# Altium PCB sot-mosfet-proto__A.PcbDoc
Units mil, origin at the board's own origin, x right, y up, seen from the top; angles counter-clockwise.
Board outline 500 x 500 mil, 2 copper layers (Top Layer, Bottom Layer), stack 61.7 mil thick; 14 components, 7 nets, 25 pads, 0 vias.
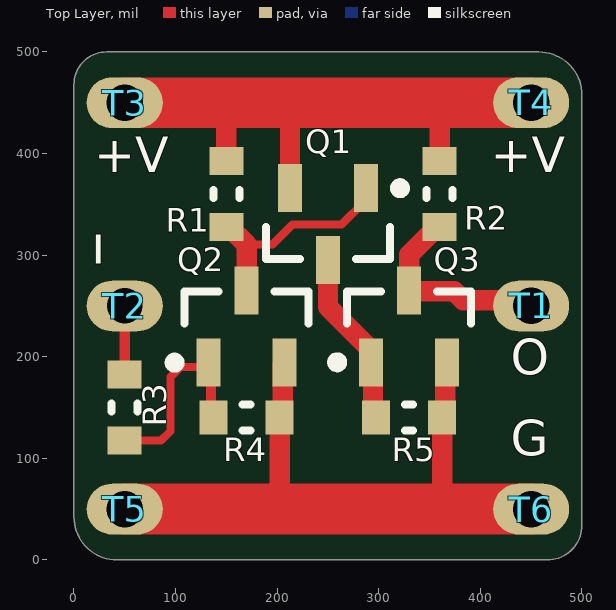
[diagram p0: Top Layer view]
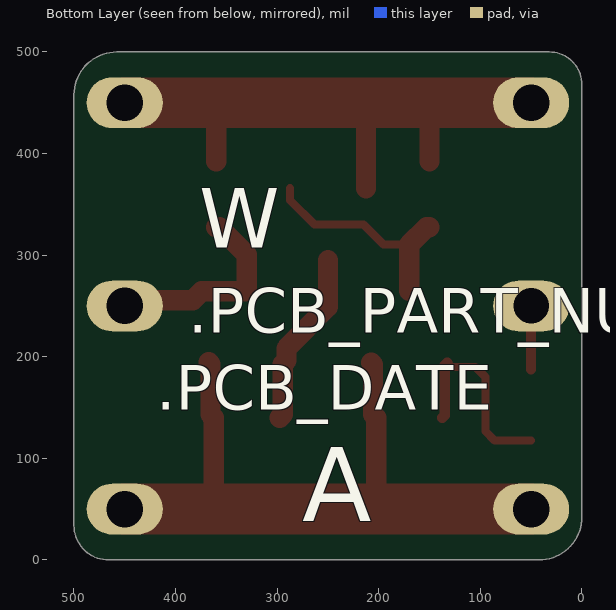
[diagram p1: Bottom Layer view, seen from below]
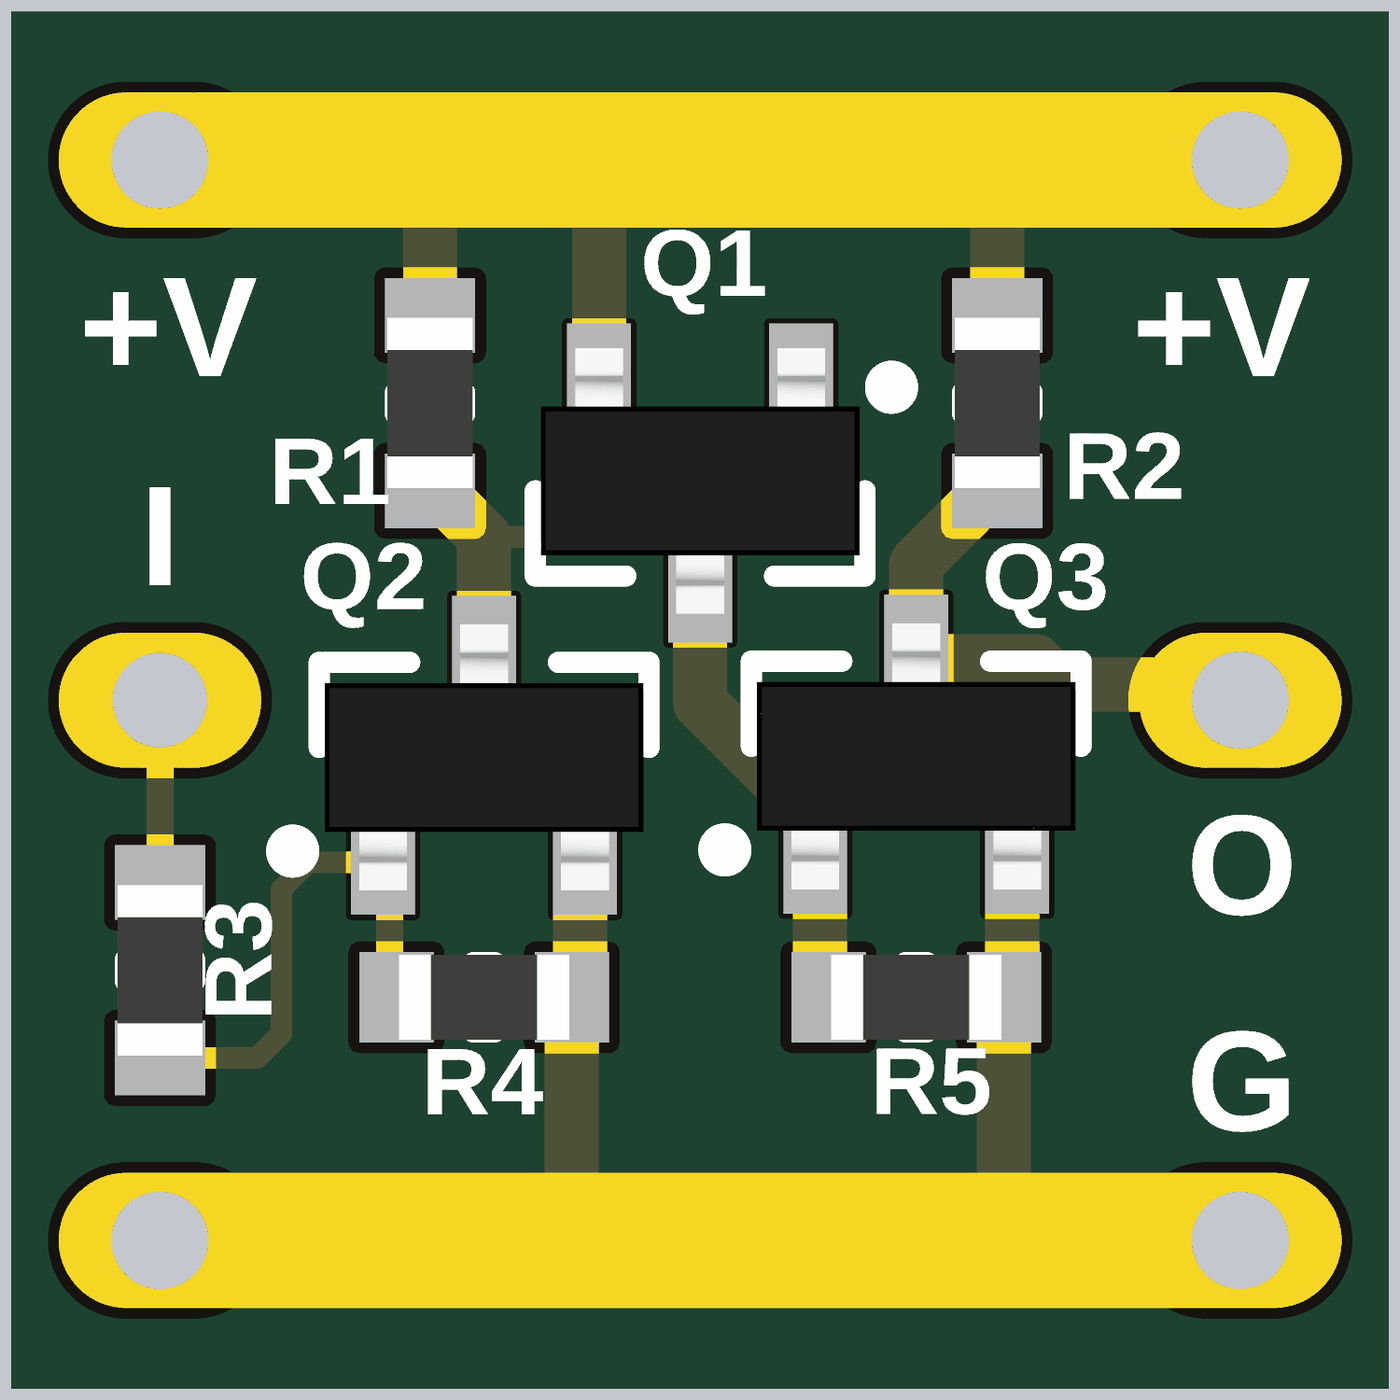
[diagram p2: 3D render of the assembled board from above, using the file's embedded part models]

## Layer stack, top to bottom
Top Solder: solder mask 0.4, Solder Resist, Dk 3.5
Top Layer: signal copper 1.4
Dielectric1: dielectric 58.9, FR-4, Dk 4.8
Bottom Layer: signal copper 1.4
Bottom Solder: solder mask 0.4, Solder Resist, Dk 3.5

## Board outline
0,42.32 0,467.75 cw(c32.25,467.75) 32.25,500 457.68,500 cw(c457.68,457.68) 500,457.68 500,34.14 cw(c465.86,34.14) 465.86,0 42.32,0 cw(c42.32,42.32)

## Design rules (kind name [scope] priority, off if disabled: settings)
Clearance [All] p1: gap=6 ignorepadtopadclearanceinfootprint=FALSE except(0: Arc-Hole Track-Hole SMDPad-Hole THPad-Hole Via-Hole Fill-Hole Poly-Hole Region-Hole Text-Hole)
PolygonConnect [All] p1: connectstyle=Relief reliefconductorwidth=10 reliefentries=4 polygonreliefangle="90 Angle" airgapwidth=10
RoutingVias [All] p1: holewidth=12 width=26 viastyle="Through Hole" minholewidth=12 minwidth=26 maxholewidth=50 maxwidth=75
SilkToSolderMaskClearance SilkscreenOverComponentPads [IsPad] p1: minsilkscreentomaskgap=10 clearancetoexposedcopper=TRUE
SolderMaskExpansion [All] p1: expansion=4 istentingtop=FALSE
SupplyNets "Schematic Supply Nets_1" [InNet('GND')] p1: voltage=0.000
SupplyNets "Schematic Supply Nets" [InNet('+V')] p2: voltage=0.000
Width [All] p1: maxlimit=200 minlimit=6 preferedwidth=6
29 further rules are at their usual default settings.

## Components (designator, comment, footprint, x,y, rotation, side; value= is the part's Value field where it differs from the comment)
Q1 "DMP3068L-7" SOT-23 250,330.43 r270 top
Q2 "FDV301N" SOT-23 170,229.57 r90 top
Q3 "FDV301N" SOT-23 330,230 r90 top
R1 "470k" R0603_0.55MM_MD 150,360 r90 top
R2 "470k" R0603_0.55MM_MD 360,360 r90 top
R3 "470k" R0603_0.55MM_MD 50,150 r90 top
R4 "470k" R0603_0.55MM_MD 170,140 r180 top
R5 "470k" R0603_0.55MM_MD 330,140 r180 top
T1 "SOLDER_HOLE" "SOLDER_HOLE -  22AWG" 450,250 r180 top
T2 "SOLDER_HOLE" "SOLDER_HOLE -  24AWG" 50,250 r0 top
T3 "SOLDER_HOLE" "SOLDER_HOLE -  22AWG" 50,450 r180 top
T4 "SOLDER_HOLE" "SOLDER_HOLE -  22AWG" 450,450 r180 top
T5 "SOLDER_HOLE" "SOLDER_HOLE -  22AWG" 50,50 r0 top
T6 "SOLDER_HOLE" "SOLDER_HOLE -  22AWG" 450,50 r180 top

## Footprints (in the part's own frame and the unit in brackets; to place one, negate y for a bottom-side part, rotate by r counter-clockwise, add the part's x,y. Pads: shape width x height; smd on the part's side, far side on the other; paste and mask are expansions set on the pad)
R0603_0.55MM_MD [mm] "Resistor 0603 Medium Density"
  rect 0.7x0.85 smd: 1(-0.825,0) 2(0.825,0)
  silkscreen extent -0.1,-0.33 0.1,0.33, body extent -0.8,-0.4 0.8,0.4, height 0.55
"SOLDER_HOLE -  22AWG" [mil]
  oval 75x50 hole 36: 1(0,0)
"SOLDER_HOLE -  24AWG" [mil]
  oval 75x50 hole 35: 1(0,0)
SOT-23 [mm] "SOT-23"
  rect 1.2x0.6 smd mask+0.05: 1(-0.9,0.95) 2(-0.9,-0.95) 3(0.9,0)
  silkscreen extent -1.02,-1.55 0.87,1.93, body extent -1.27,-1.5 1.23,1.5, height 1.07

## Part data
Q1: "MOSFET P-CH 30V 3.9A SOT23", Case/Package=TO-236-3, Continuous Drain Current (ID)=3.3A, Drain to Source Voltage (Vdss)=30V, Input Capacitance=708pF, Manufacturer=Diodes, Max Operating Temperature=150°C, Max Power Dissipation=700mW, Min Operating Temperature=-55°C, Supplier Part Number 1=DMP3068L-7DIDKR-ND, Manufacturer Part Number=DMP3068L-7, Mount="Surface Mount", Packaging="Tape and Reel", Pricing 1="1=0.52, 10=0.377, 100=0.2222, 500=0.12576, 1000=0.09642 (USD)", Rds On Max=72mR, Stock 1=55860, Supplier 1=Digi-Key
Q2 Q3: "MOSFET N-CH 25V 220MA SOT-23", Current - Continuous Drain (Id) @ 25°C="220mA (Ta)", Drain to Source Voltage (Vdss)=25V, Input Capacitance (Ciss) @ Vds="9.5pF @ 10V", Manufacturer="Fairchild Semiconductor", Operating Temperature="-55°C ~ 150°C (TJ)", Package / Case="TO-236-3, SC-59, SOT-23-3", Power - Max=350mW, Supplier Device Package=SOT-23, Supplier Part Number 1=FDV301NCT-ND, Category="Discrete Semiconductor Products", ComponentLink1Description=http://www.fairchildsemi.com/datasheets/FD/FDV301N.pdf, ComponentLink1URL=http://www.fairchildsemi.com/datasheets/FD/FDV301N.pdf, ComponentLink2Description=http://media.digikey.com/pdf/Data%20Sheets/Fairchild%20PDFs/FDV301N.pdf, ComponentLink2URL=http://media.digikey.com/pdf/Data%20Sheets/Fairchild%20PDFs/FDV301N.pdf, FET Feature="Logic Level Gate", FET Type="MOSFET N-Channel, Metal Oxide", Gate Charge (Qg) @ Vgs="0.7nC @ 4.5V", Manufacturer Part Number=FDV301N, Mounting Type="Surface Mount", Packaging="Tape & Reel (TR)", Pricing 1="1=0.23, 10=0.188, 100=0.0998, 500=0.06562, 1000=0.04471 (USD)", Rds On (Max) @ Id, Vgs="4 Ohm @ 400mA, 4.5V", RoHS="RoHS Compliant", Stock 1=279430, Supplier 1=Digi-Key, Vgs(th) (Max) @ Id="1.06V @ 250µA"
R1 R2 R3 R4 R5: library part ERJ-3EKF4703V, "RES 470K OHM 1/10W 1% 0603 SMD", Limiting Element Voltage=75, Manufacturer="Panasonic Electronic Components", Maximum Overload Voltage=150, Maximum Working Voltage=75.0V, Package="0603 (1608 Metric)", Package Power="0603  (0.1W)", Power (Watts)="0.1W- 1/10W", Ratings=AEC-Q200, Sort Value=470000, Sort Value Package=603_470000, Supplier Package=0603, Supplier Part Number 1=P470KHCT-ND, Temperature Coefficient=±100ppm/°C, Tolerance=±1%, Category=Resistors, ComponentLink1Description="Internal Datasheet", ComponentLink1URL="datasheets\Panasonic Electronic Components\AOA0000CE2.pdf", ComponentLink2Description="External Datasheet", ComponentLink2URL=http://industrial.panasonic.com/www-data/pdf/AOA0000/AOA0000CE2.pdf, Composition="Thick Film", Features=-, Height=0.55MM, Manufacturer Part Number=ERJ-3EKF4703V, Number of Terminations=2, Packaging="Cut Tape (CT)", Resistance (Ohms)=470k, Size / Dimension="0.063\" L x 0.031\" W (1.60mm x 0.80mm)", Substitution Notes="470k , ±1% , 0603 , AEC-Q200", Supplier 1=Digi-Key
T1 T2 T3 T4 T5 T6: "A Generic Hole for attaching flying leads"

## Nets (pads, with @x,y where several pads share a name; then routed paths per layer and width w, separated by ;. In a path a pad name is that pad's centre, name@x,y a point inside that pad or via, vN(x,y) a via of type N, cw(c..) or ccw(c..) an arc to the next point about the centre after c; other vN are vias at no path point)
+V: Q1.2 R1.2 R2.2 T3.1 T4.1 | length 600.2
  Top Layer w20: R1.2 150,450 ; 210,450 212.6,447.4 Q1.2 ; R2.2 360,450
  Top Layer w50: T3.1 150,450 210,450 360,450 T4.1
GND: Q2.2 Q3.2 R4.1 R5.1 T5.1 T6.1 | length 694.8
  Top Layer w20: 205,50 202.48,52.52 R4.1 205.59,143.11 205.59,192.32 Q2.2 ; 360,50 362.48,52.48 R5.1 365.59,143.11 365.59,192.76 Q3.2
  Top Layer w50: T5.1 205,50 360,50 T6.1
NetQ1_1: Q1.1 Q2.3 R1.1 | length 219.8
  Top Layer w8: 170,310.47 195.47,310.47 215,330 263.35,330 287.4,354.05 Q1.1
  Top Layer w20: R1.1 152.95,327.52 170,310.47 Q2.3
NetQ1_3: Q1.3 Q3.1 R5.2 | length 174.7
  Top Layer w20: Q1.3 250,248.98 290.79,208.19 290.79,196.38 294.41,192.76 294.41,143.11 R5.2
NetQ2_1: Q2.1 R3.1 R4.2 | length 201.8
  Top Layer w8: R3.1 85.87,117.52 95,126.65 95,180 105,190 128.46,190 Q2.1
  Top Layer w10: Q2.1 135.06,191.67 135.06,142.46 R4.2
NetQ3_3: Q3.3 R2.1 T1.1 | length 202.6
  Top Layer w20: R2.1 357.05,327.52 330,300.47 Q3.3 330.98,264.45 374.29,264.45 383,255.74 444.26,255.74 T1.1
NetR3_2: R3.2 T2.1 | length 62.5
  Top Layer w10: R3.2@50,187.48 T2.1

## Silkscreen, mask and mechanical layers (free items; w line width, h text height)
Top Overlay:
  text "+V" at 20,370 h60
  text "+V" at 410,370 h60
  text "I" at 17.15,280 h60
  text "O" at 430,170.71 h60
  text "G" at 430,90.71 h60
Bottom Overlay:
  text "W" at 376.62,287.87 h100
  text ".PCB_PART_NUMBER" at 387.44,209.37 h75
  text ".PCB_DATE" at 419.18,133.37 h75
  text "A" at 275.23,13.94 h125
[8] Board Outline:
  the board outline again, w10